# Altium PCB ProjectDK.PcbDoc
Units mil, origin at the board's own origin, x right, y up, seen from the top; angles counter-clockwise.
Board outline 3200 x 3000 mil, 4 copper layers (Component, Digital, Power, Ground), stack 23.756 mil thick; 75 components, 36 nets, 216 pads, 0 vias.
Unrouted connection lines stored in the file: 130.
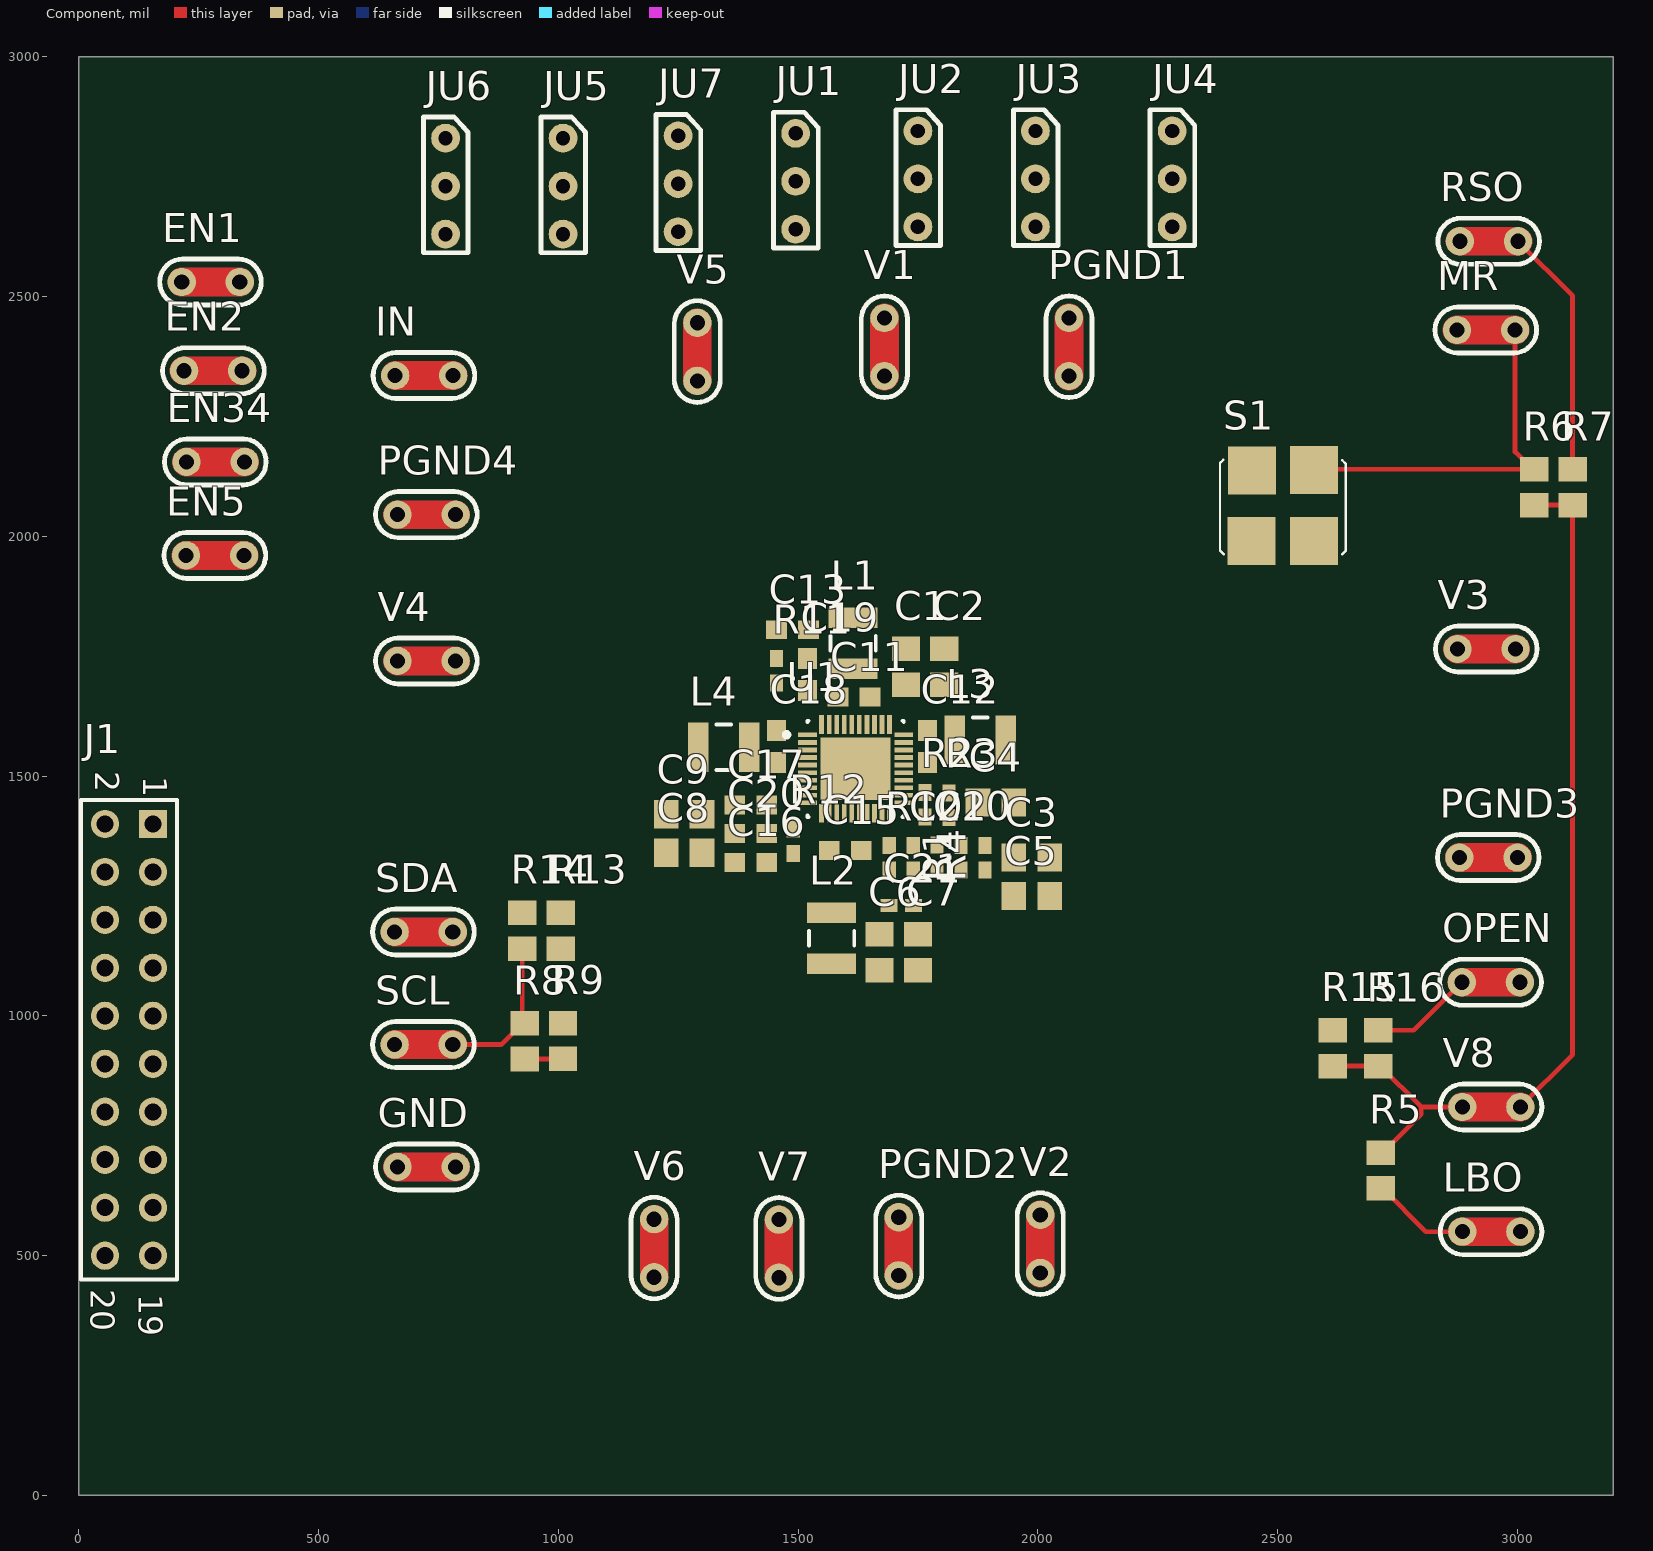
[diagram p0: Component view]
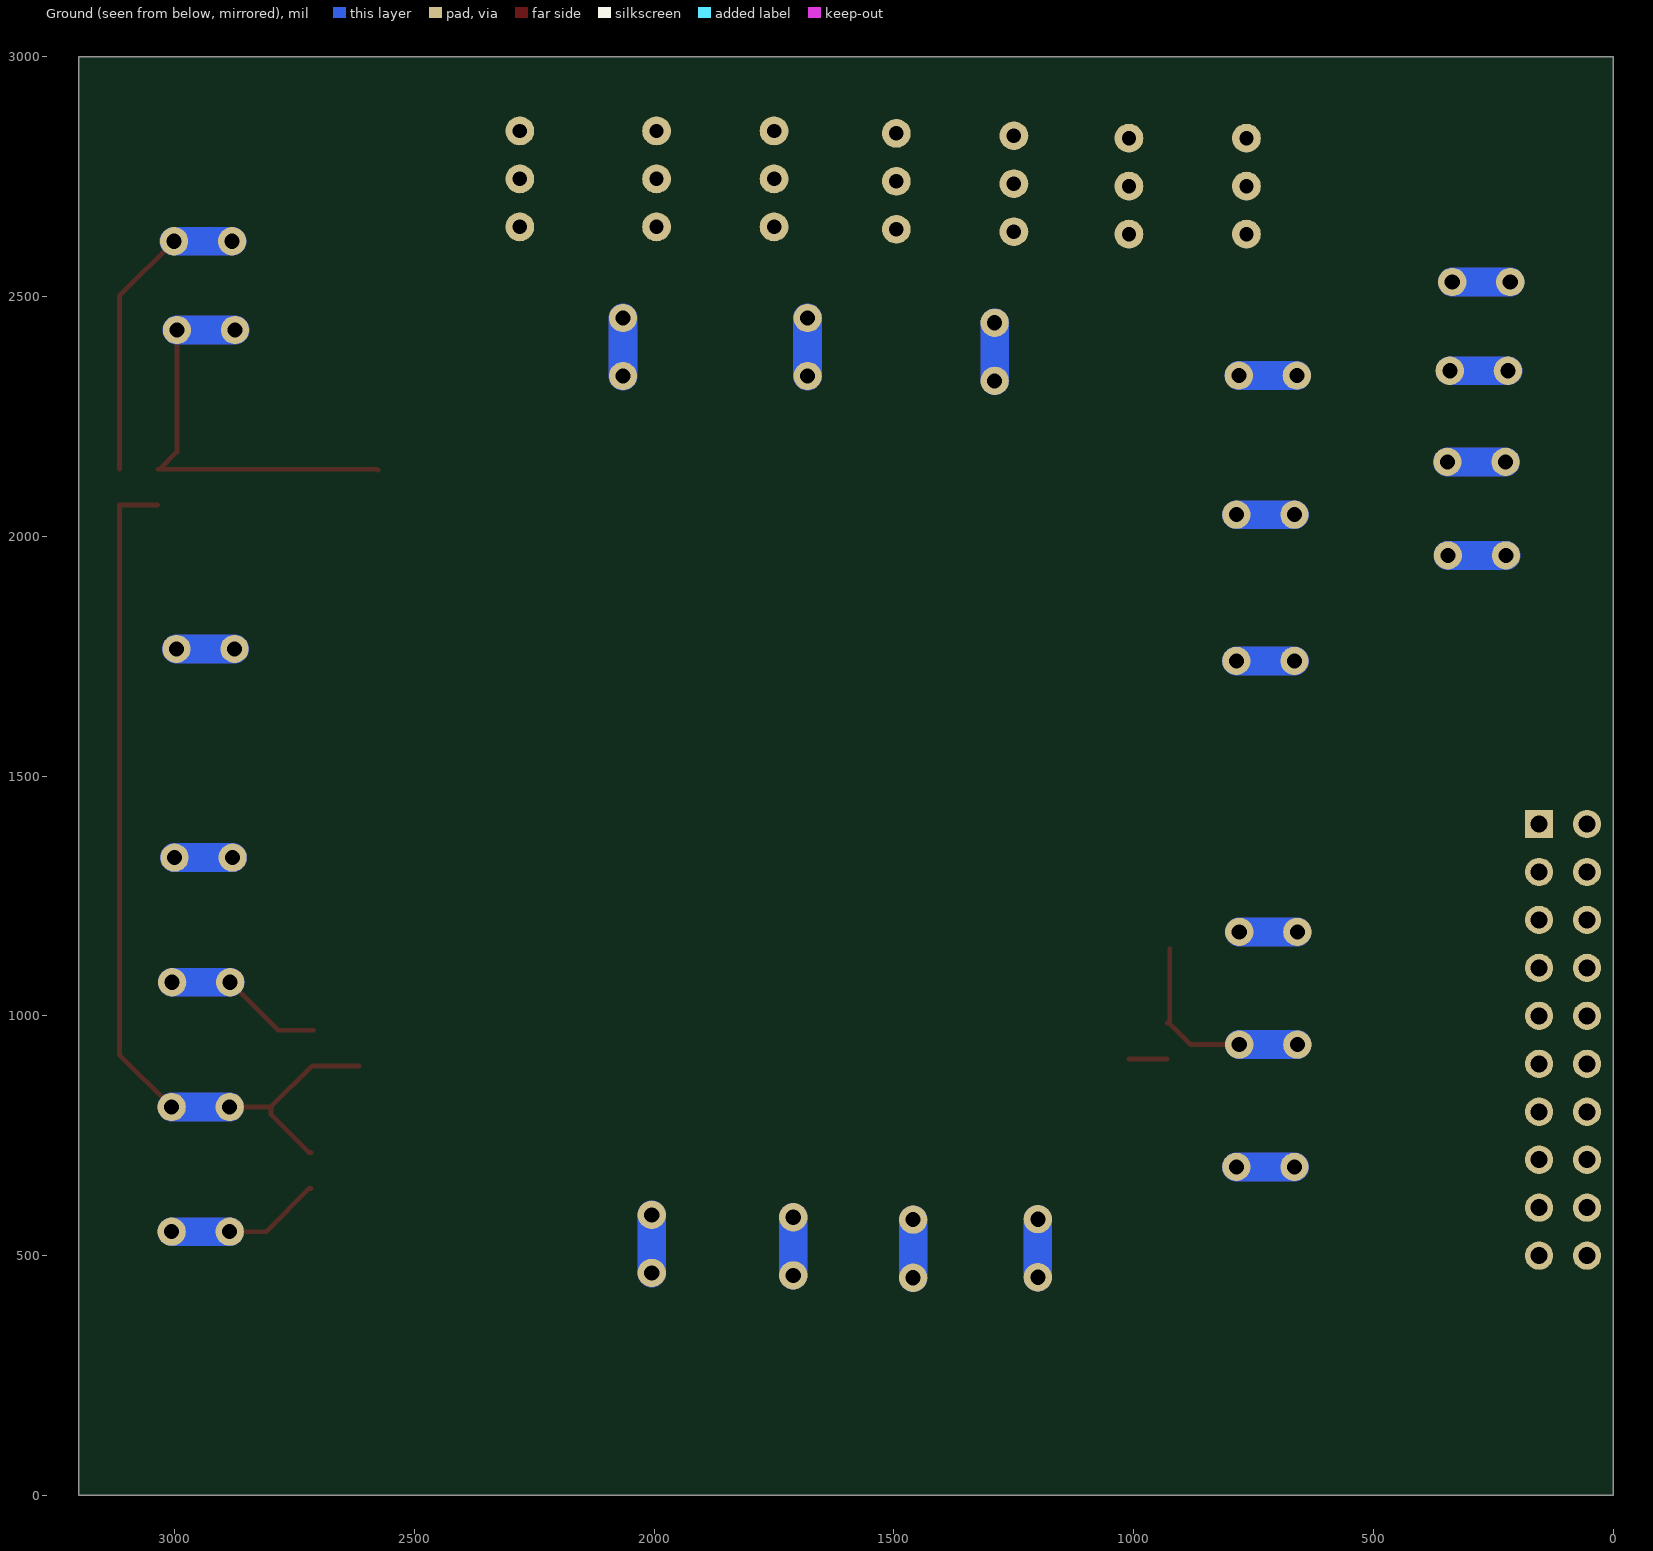
[diagram p1: Ground view, seen from below]
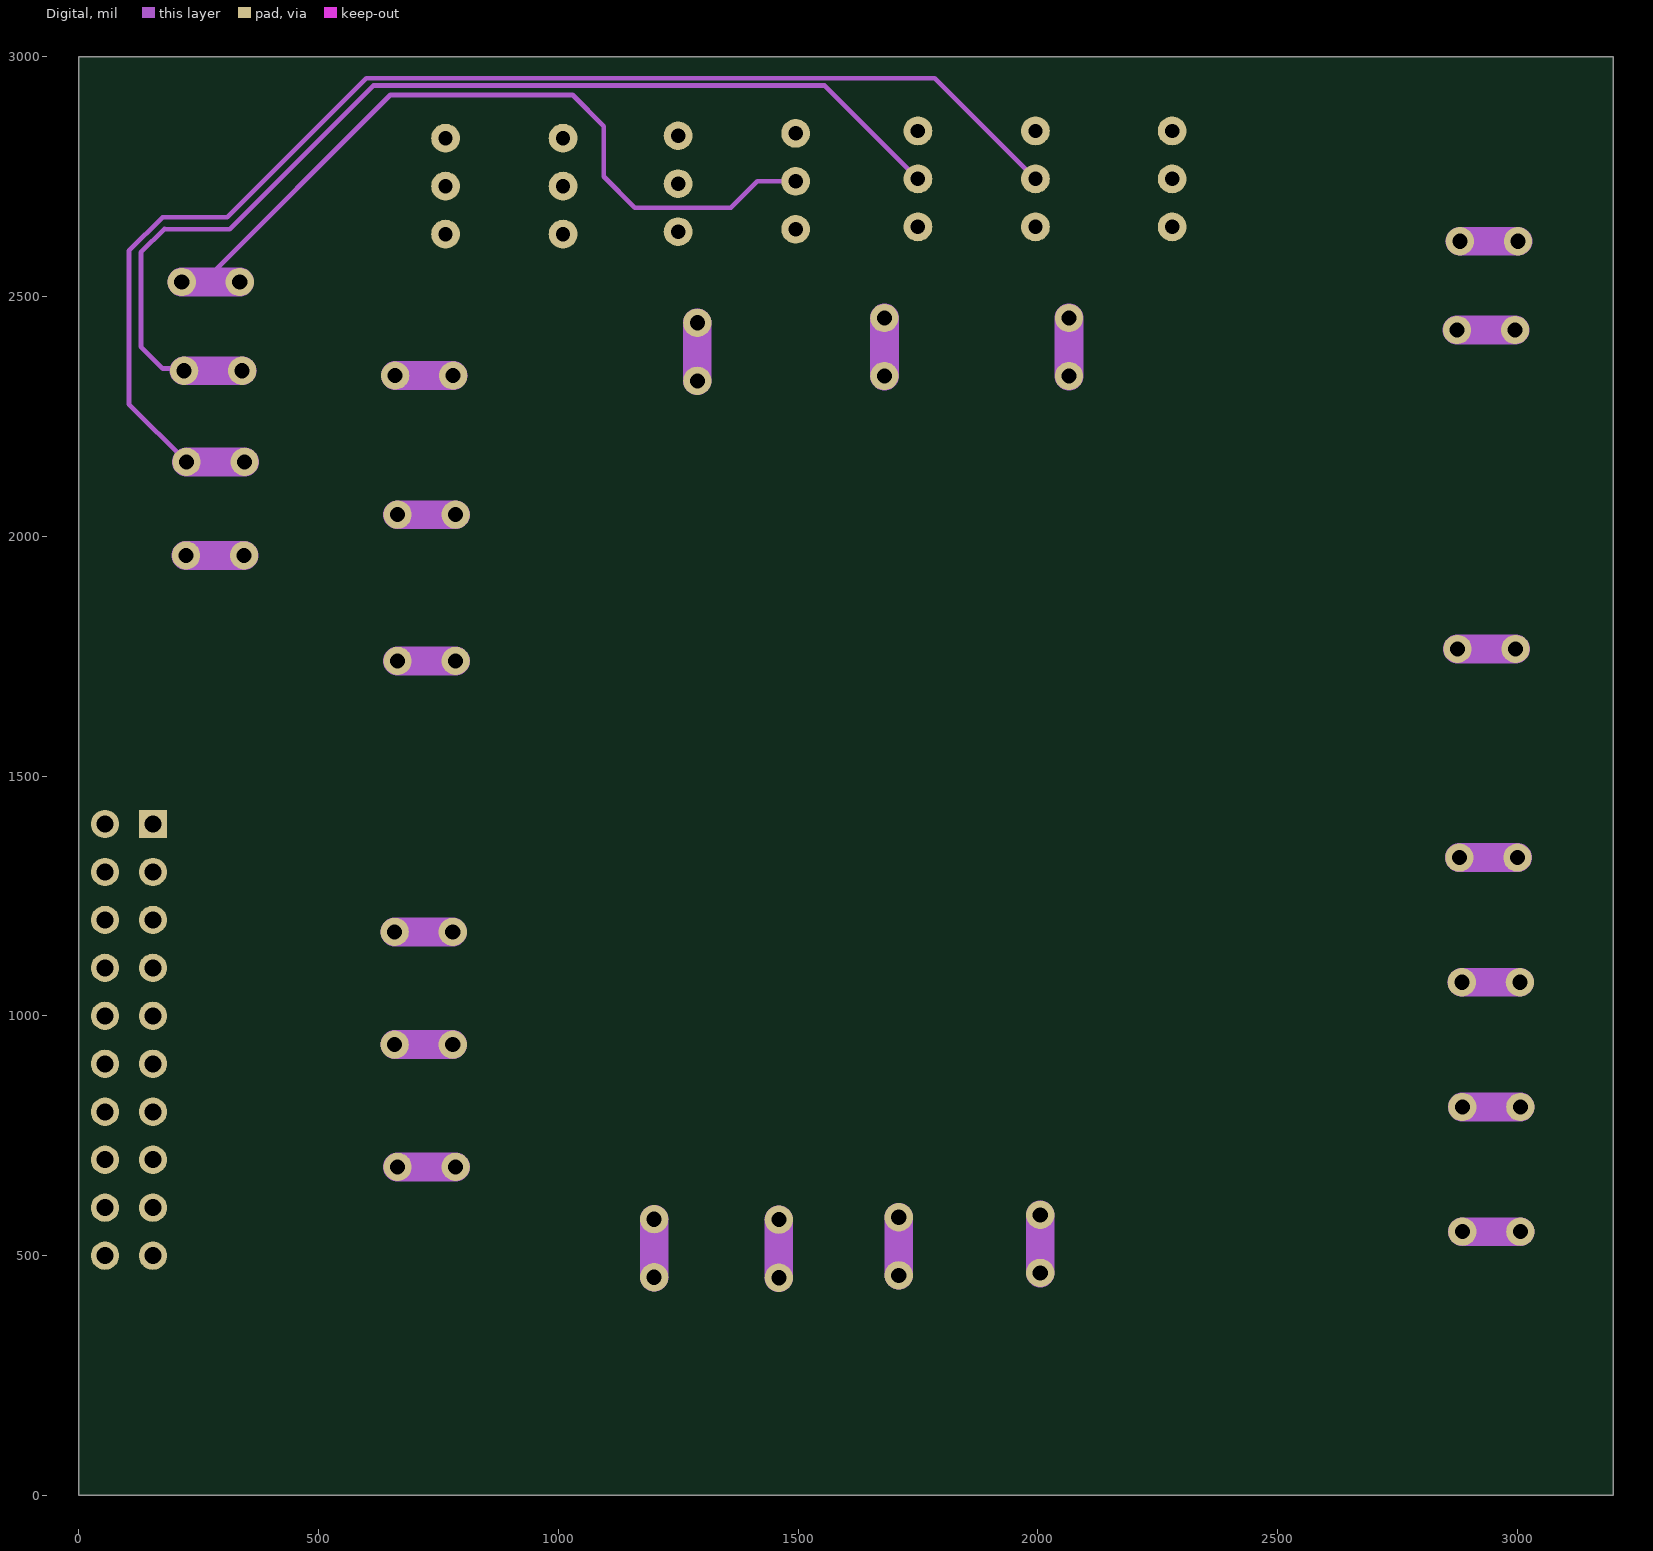
[diagram p2: Digital]

## Layer stack, top to bottom
Top Solder: solder mask 0.4, Solder Resist, Dk 3.5
Component: signal copper 1.4
Dielectric 2: prepreg 2.8, PP-006, Dk 4.1
Digital: signal copper 1.378
Dielectric 1: dielectric 12.6, FR-4, Dk 4.8
Power: signal copper 1.378
Dielectric 3: prepreg 2.8, PP-006, Dk 4.1
Ground: signal copper 1.4
Bottom Solder: solder mask 0.4, Solder Resist, Dk 3.5

## Board outline
0,0 3200,0 3200,3000 0,3000

## Design rules (kind name [scope] priority, off if disabled: settings)
Clearance [All] p1: gap=4 ignorepadtopadclearanceinfootprint=FALSE
PolygonConnect [All] p1: connectstyle=Relief reliefconductorwidth=10 reliefentries=4 polygonreliefangle="90 Angle" airgapwidth=10
RoutingVias [All] p1: holewidth=3 width=5 viastyle="Through Hole" minholewidth=3 minwidth=5 maxholewidth=3 maxwidth=5
SolderMaskExpansion [All] p1: expansion=4 istentingtop=FALSE
Width [All] p1: maxlimit=10 minlimit=10 preferedwidth=10
30 further rules are at their usual default settings.

## Components (designator, comment, footprint, x,y, rotation, side; value= is the part's Value field where it differs from the comment)
C1 "Cap" 2012[0805] 1725,1727.6 r90 top value=100pF
C2 "Cap" 2012[0805] 1805,1727.6 r90 top value=100pF
C3 "Cap" 2012[0805] 1987.6,1330 r0 top value=100pF
C4 "Cap" 2012[0805] 1912.6,1445 r0 top value=100pF
C5 "Cap" 2012[0805] 1987.4,1250 r0 top value=100pF
C6 "Cap" 2012[0805] 1670,1132.4 r270 top value=100pF
C7 "Cap" 2012[0805] 1750,1132.6 r270 top value=100pF
C8 "Cap" 2012[0805] 1262.4,1340 r0 top value=100pF
C9 "Cap" 2012[0805] 1262.4,1420 r0 top value=100pF
C10 "Cap" 1005[0402] 1790,1330.59 r270 top value=100pF
C11 "Cap" 1608[0603] 1616.54,1665 r180 top value=100pF
C12 "Cap" 1608[0603] 1770,1561.54 r90 top value=100pF
C13 "Cap" 1608[0603] 1488.46,1805 r180 top value=100pF
C15 "Cap" 1608[0603] 1598.46,1345 r180 top value=100pF
C16 "Cap" 1608[0603] 1401.54,1320 r0 top value=100pF
C17 "Cap" 1608[0603] 1401.54,1440 r0 top value=100pF
C18 "Cap" 1608[0603] 1455,1561.54 r90 top value=100pF
C19 "Cap" 1608[0603] 1520,1711.54 r90 top value=100pF
C20 "Cap" 1608[0603] 1401.54,1380 r0 top value=100pF
C21 "Cap" 1005[0402] 1715.59,1230 r180 top value=100pF
C22 "Cap" 1005[0402] 1740,1329.41 r90 top value=100pF
EN1 "2-pin Header" CON_1#1 215,2530 r180 top
EN2 "2-pin Header" CON_1#2 341,2345 r0 top
EN5 "2-pin Header" CON_1#2 224,1960 r180 top
EN34 "2-pin Header" CON_1#2 225,2155 r180 top
GND "2-pin Header" CON_1#2 665,685 r180 top
IN "2-pin Header" CON_1#2 660,2335 r180 top
J1 "10x2 Header" HDR2X10 155,1400 r270 top
JU1 "3-pin Header" CON3 1495,2640 r90 top
JU2 "3-pin Header" CON3 1750,2645 r90 top
JU3 "3-pin Header" CON3 1995,2645 r90 top
JU4 "3-pin Header" CON3 2280,2645 r90 top
JU5 "3-pin Header" CON3 1010,2630 r90 top
JU6 "3-pin Header" CON3 765,2630 r90 top
JU7 "3-pin Header" CON3 1250,2635 r90 top
L1 "Inductor" INDC3225L 1615,1776.85 r90 top value=10mH
L2 "Inductor" INDC3225L 1570,1161.85 r90 top value=10mH
L3 "Inductor" INDC3225L 1880,1575 r0 top value=10mH
L4 "Inductor" INDC3225L 1345,1560 r0 top value=10mH
LBO "2-pin Header" CON_1#2 2885,550 r180 top
MR "2-pin Header" CON_1#2 2874,2430 r180 top
OPEN "2-pin Header" CON_1#2 2884,1070 r180 top
PGND1 "2-pin Header" CON_1#2 2065,2455 r90 top
PGND2 "2-pin Header" CON_1#2 1710,580 r90 top
PGND3 "2-pin Header" CON_1#2 2879,1330 r180 top
PGND4 "2-pin Header" CON_1#2 665,2045 r180 top
R1 "Res3" 1005[0402] 1840,1329.41 r90 top value=1K
R2 "Res3" 1005[0402] 1765,1440.59 r90 top value=1K
R3 "Res3" 1005[0402] 1815,1439.41 r270 top value=1K
R4 "Res3" 1005[0402] 1890,1329.41 r90 top value=1K
R5 "Res3" 2012[0805] 2715,677.6 r90 top value=1K
R6 "Res3" 2012[0805] 3035,2102.4 r90 top value=1K
R7 "Res3" 2012[0805] 3115,2102.4 r90 top value=1K
R8 "Res3" 2012[0805] 930,947.4 r90 top value=1K
R9 "Res3" 2012[0805] 1010,947.6 r270 top value=1K
R10 "20 Ohm" 1005[0402] 1690,1329.41 r90 top value=1K
R11 "Res3" 1005[0402] 1455,1719.41 r90 top value=1K
R12 "Res3" 1005[0402] 1490,1364.41 r90 top value=1K
R13 "Res3" 2012[0805] 1005,1177.6 r90 top value=1K
R14 "Res3" 2012[0805] 925,1177.6 r90 top value=1K
R15 "SHORT" 2012[0805] 2615,932.6 r90 top value=1K
R16 "OPEN" 2012[0805] 2710,932.4 r270 top value=1K
RSO "2-pin Header" CON_1#2 2880,2615 r180 top
S1 "SW-SPST" PUSH_SWITCH 2938.77,2121.44 r180 top
SCL "2-pin Header" CON_1#2 659,940 r180 top
SDA "2-pin Header" CON_1#2 659,1175 r180 top
U1 "MAX8660ETL+" MAX8660_QFN 1620,1515 r0 top
V1 "2-pin Header" CON_1#2 1680,2455 r90 top
V2 "2-pin Header" CON_1#2 2005,585 r90 top
V3 "2-pin Header" CON_1#2 2875,1765 r180 top
V4 "2-pin Header" CON_1#2 665,1740 r180 top
V5 "2-pin Header" CON_1#2 1290,2445 r90 top
V6 "2-pin Header" CON_1#2 1200,576 r90 top
V7 "2-pin Header" CON_1#2 1460,575 r90 top
V8 "2-pin Header" CON_1#2 2885,810 r180 top

## Footprints (in the part's own frame and the unit in brackets; to place one, negate y for a bottom-side part, rotate by r counter-clockwise, add the part's x,y. Pads: shape width x height; smd on the part's side, far side on the other; paste and mask are expansions set on the pad)
1005[0402] [mm] "Chip Resistor; Body 1.1 x 0.5 mm (LxW typ)"
  rect 0.9x0.7 smd: 1(-0.65,0) 2(0.65,0)
1608[0603] [mm] "Chip Resistor; Body 1.6 x 0.8 mm (LxW typ)"
  rect 1.1x1 smd: 1(-0.85,0) 2(0.85,0)
2012[0805] [mm] "Chip Resistor; Body 2.0 x 1.3 mm (LxW typ)"
  rect 1.3x1.5 smd: 1(-0.95,0) 2(0.95,0)
CON3 [mil]
  round 60 hole 30: 1(0,0) 2(100,0) 3(200,0)
  silkscreen extent -39,-47 244,46
CON_1#1 [mm]
  round 1.5 hole 0.8: 0(0,0) 1(-3.073,0)
  Multi-Layer lines w1.524: 0,0 -1.143,0 -3.073,0
  silkscreen extent -4.22,-1.22 1.17,1.22
CON_1#2 [mm]
  round 1.5 hole 0.8: 0(0,0) 1(-3.073,0)
  Multi-Layer lines w1.524: -3.073,0 0,0
  silkscreen extent -4.22,-1.22 1.17,1.22
HDR2X10 [mm] "Connector; Header; 10x2 Position"
  rect 1.5x1.5 hole 0.9: 1(0,0)
  round 1.5 hole 0.9: 2(0,-2.54) 3(2.54,0) 4(2.54,-2.54) 5(5.08,0) 6(5.08,-2.54) 7(7.62,0) 8(7.62,-2.54) 9(10.16,0) 10(10.16,-2.54) 11(12.7,0) 12(12.7,-2.54) 13(15.24,0) 14(15.24,-2.54) 15(17.78,0) 16(17.78,-2.54) 17(20.32,0) 18(20.32,-2.54) 19(22.86,0) 20(22.86,-2.54)
  silkscreen extent -1.27,-3.81 24.13,1.27
INDC3225L [mm] "Chip Inductor, Body 3.2x2.5mm, IPC High Density"
  rect 1.1x2.6 smd: 1(-1.35,0) 2(1.35,0)
  silkscreen extent -0.4,-1.2 0.4,1.2, body extent -1.7,-1.35 1.7,1.35, height 1.5
MAX8660_QFN [mm] "QFN, 40-Leads, Body 5.1x5.1mm (max), Pitch 0.40mm, IPC Medium Density"
  rect 1x0.25 smd: 1(-2.55,1.8) 2(-2.55,1.4) 3(-2.55,1) 4(-2.55,0.6) 5(-2.55,0.2) 6(-2.55,-0.2) 7(-2.55,-0.6) 8(-2.55,-1) 9(-2.55,-1.4) 10(-2.55,-1.8) 21(2.55,-1.8) 22(2.55,-1.4) 23(2.55,-1) 24(2.55,-0.6) 25(2.55,-0.2) 26(2.55,0.2) 27(2.55,0.6) 28(2.55,1) 29(2.55,1.4) 30(2.55,1.8)
  rect 0.25x1 smd: 11(-1.8,-2.35) 12(-1.4,-2.35) 13(-1,-2.35) 14(-0.6,-2.35) 15(-0.2,-2.35) 16(0.2,-2.35) 17(0.6,-2.35) 18(1,-2.35) 19(1.4,-2.35) 20(1.8,-2.35) 31(1.8,2.35) 32(1.4,2.35) 33(1,2.35) 34(0.6,2.35) 35(0.2,2.35) 36(-0.2,2.35) 37(-0.6,2.35) 38(-1,2.35) 39(-1.4,2.35) 40(-1.8,2.35)
  rect 3.7x3.3 smd: 41(0,0)
  silkscreen extent -3.78,-2.55 2.55,2.55, body extent -2.55,-2.55 2.55,2.55, height 0.8
PUSH_SWITCH [mm]
  rect 2.54x2.54 smd: 0(9.221,3.339) 1(9.221,-0.429) 2(12.542,3.339) 3(12.5,-0.4)
  silkscreen extent 7.54,-0.96 14.2,4.05, body extent 8.49,-1.01 13.31,3.81, height 1.5

## Part data
C1 C2 C3 C4 C5 C6 C7 C8 C9 C10 C11 C12 C13 C15 C16 C17 C18 C19 C20 C21 C22: "Capacitor", LatestRevisionDate=17-Jul-2002, LatestRevisionNote="Re-released for DXP Platform.", PackageReference=RAD-0.3, Published=8-Jun-2000, Publisher="Altium Limited"
R1 R2 R3 R4 R5 R6 R7 R8 R9 R11 R12 R13 R14: "Resistor", LatestRevisionDate=04-Mar-2005, LatestRevisionNote="PCB Footprint replaced.", PackageReference=J1-0603, Published=8-Jun-2000, Publisher="Altium Limited"
R10 R15 R16: library part Res3, "Resistor", LatestRevisionDate=04-Mar-2005, LatestRevisionNote="PCB Footprint replaced.", PackageReference=J1-0603, Published=8-Jun-2000, Publisher="Altium Limited"
S1: "Single-Pole, Single-Throw Switch", LatestRevisionDate=17-Jul-2002, LatestRevisionNote="Re-released for DXP Platform.", PackageReference=SPST-2, Published=24-Mar-1999, Publisher="Altium Limited"
L1 L2 L3 L4: Code_IEC=1005, Code_JEITA=0402, LatestRevisionDate=17-Jul-2002, LatestRevisionNote="Re-released for DXP Platform.", PackageReference=0402-A, Published=8-Jun-2000, Publisher="Altium Limited"

## Nets (pads, with @x,y where several pads share a name; then routed paths per layer and width w, separated by ;. In a path a pad name is that pad's centre, name@x,y a point inside that pad or via, vN(x,y) a via of type N, cw(c..) or ccw(c..) an arc to the next point about the centre after c; other vN are vias at no path point)
GND: C1.1 C2.1 C3.1 C4.1 C5.1 C6.1 C7.1 C8.1 C9.1 C10.2 C11.1 C12.1 C13.1 C15.1 C16.1 C17.1 C18.1 C19.1 C20.1 C21.2 C22.1 GND.0 GND.1 J1.2 J1.4 J1.5 J1.6 J1.8 J1.10 J1.12 J1.14 J1.16 J1.18 J1.19 JU1.1 JU2.1 JU3.1 JU4.1 JU5.1 JU6.1 JU7.1 PGND1.0 PGND1.1 PGND2.0 PGND2.1 PGND3.0 PGND3.1 PGND4.0 PGND4.1 R3.2 R4.1 S1.2 U1.5 U1.16 U1.19 U1.26 U1.34
IN: C11.2 C12.2 C15.2 C18.2 C21.1 IN.0 IN.1 JU1.3 JU2.3 JU3.3 JU4.3 JU5.3 JU6.3 JU7.3 R1.1 R10.1 R11.1 R12.2 U1.3 U1.14 U1.17 U1.28 U1.36
NetC3_2: C3.2 C4.2 C5.2 L3.2 U1.30 V3.0 V3.1
NetC8_2: C8.2 C9.2 L4.2 U1.40 V4.0 V4.1
NetC10_1: C10.1 R15.2 U1.20
NetC13_2: C13.2 U1.2 V5.0 V5.1
NetC16_2: C16.2 U1.9 V7.0 V7.1
NetC17_2: C17.2 U1.7 V6.0 V6.1
NetC19_2: C19.2 R11.2 U1.1
NetC20_2: C20.2 R12.1 U1.8
NetC22_2: C22.2 R10.2 U1.18
NetEN1_0: EN1.0 EN1.1 JU1.2 U1.37 | length 1623.2
  Digital w10: EN1.0 260,2530 650,2920 1030,2920 1095,2855 1095,2750 1160,2685 1360,2685 1415,2740 JU1.2
NetEN2_0: EN2.0 EN2.1 JU2.2 U1.32 | length 2153.2
  Digital w10: EN2.1 215.47,2349.53 175.47,2349.53 130,2395 130,2591.72 179.14,2640.86 180,2640 315,2640 615,2940 1555,2940 JU2.2
NetEN5_0: EN5.0 EN5.1 JU4.2 U1.25
NetEN34_0: EN34.0 EN34.1 JU3.2 U1.31 | length 2615.8
  Digital w10: EN34.0 105,2275 105,2595 175,2665 310,2665 600,2955 1785,2955 JU3.2
NetJ1_3: J1.3 R9.1 R13.1 SDA.0 SDA.1
NetJ1_7: J1.7 R8.2 R14.1 SCL.0 SCL.1 | length 326
  Component w10: SCL.1 881.26,940 926.06,984.8 R8.2 925,989.8 R14.1
NetJU5_2: JU5.2 U1.39
NetJU6_2: JU6.2 U1.6
NetJU7_2: JU7.2 U1.33
NetL1_1: L1.1 U1.35
NetL2_1: L2.1 U1.15
NetL3_1: L3.1 U1.27
NetL4_1: L4.1 U1.4
NetLBO_0: LBO.0 LBO.1 R5.1 U1.13 | length 207.4
  Component w10: R5.1 2718.94,640.2 2809.13,550 LBO.0
NetMR_0: MR.0 MR.1 R6.2 S1.1 U1.23 | length 765
  Component w10: S1.1 2577.22,2139.8 R6.2@3031.06,2139.8 ; MR.1 2995,2175.87 R6.2@3031.06,2139.8 ; R6.2 R6.2@3031.06,2139.8
NetOPEN_0: OPEN.0 OPEN.1 R16.1 | length 215.5
  Component w10: R16.1 2783.8,969.8 OPEN.0
NetR1_2: R1.2 R2.1 U1.21
NetR2_2: R2.2 R3.1 U1.22
NetR4_2: R4.2 U1.24
NetR5_2: R5.2 R6.1 R7.1 R15.1 R16.2 V8.0 V8.1 | length 1817.5
  Component w10: R15.1 2709.8,895.2 R16.2 2713.94,895 2798.94,810 ; R5.2 2718.94,715 2798.94,795 2798.94,810 ; V8.0 2798.94,810 ; V8.1 3115,919 R7.1 R6.1
NetR7_2: R7.2 RSO.0 RSO.1 U1.29 | length 522.4
  Component w10: RSO.1 3115,2501 R7.2
NetR13_2: R13.2 U1.12
NetR14_2: R14.2 U1.11
V1: C1.2 C2.2 L1.2 R8.1 R9.2 U1.38 V1.0 V1.1 | length 80.1
  Component w10: R8.1 1009.8,910 R9.2
V2: C6.2 C7.2 L2.2 U1.10 V2.0 V2.1
pads on no net: J1.1 J1.9 J1.11 J1.13 J1.15 J1.17 J1.20 S1.0 S1.3 U1.41

## Text inside footprints (layer, text, board x,y; h text height)
J1: Top Overlay "2" at 35,1510 h50 r270; Top Overlay "1" at 135,1500 h50 r270; Top Overlay "19" at 125,420 h50 r270; Top Overlay "20" at 25,430 h50 r270